# Altium PCB KY-012-Active-buzzer-module-pcb_2025-10-18.pcbdoc
Units mm, origin at the board's own origin, x right, y up, seen from the top; angles counter-clockwise.
Board outline 40.38 x 49.09 mm, 2 copper layers (Top Layer, Bottom Layer); 2 components, 5 nets, 7 pads, 0 vias.
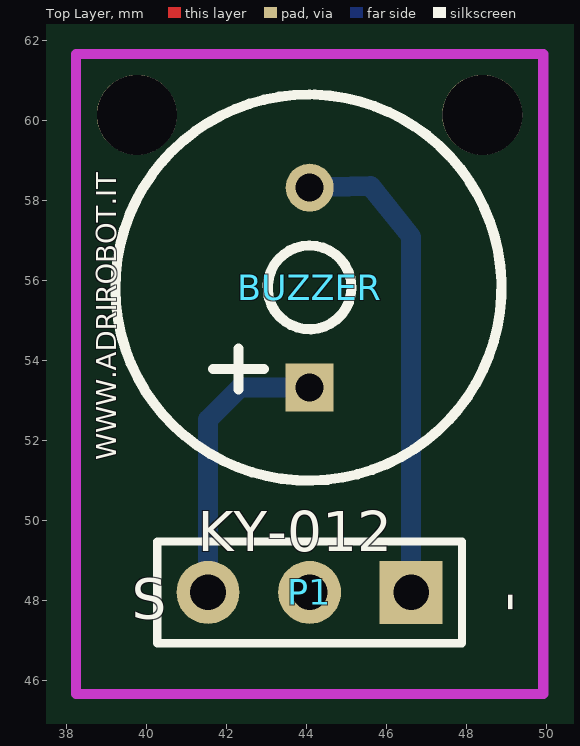
[diagram p0: Top Layer view]
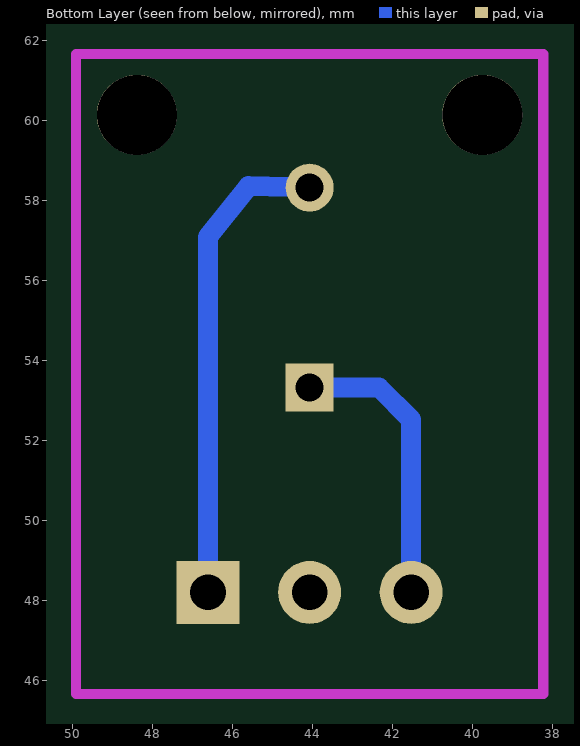
[diagram p1: Bottom Layer view, seen from below]

## Layer stack, top to bottom
Top Layer: signal copper (thickness not stored)
Dielectric: dielectric 0.32, FR-4, Dk 4.8
Bottom Layer: signal copper (thickness not stored)

## Board outline
65.777,25.4 25.4,25.4 25.4,74.489 65.777,74.489

## Components (designator, comment, footprint, x,y, rotation, side; value= is the part's Value field where it differs from the comment)
BUZZER "ZL-DCY09605-2705P-5" BUZZER-R9.6-2P-5.0PITCH 44.069,55.82 r90 top
P1 "Header-Male-2.54_1x3" HDR-3X1/2.54 44.069,48.2 r180 top

## Footprints (in the part's own frame and the unit in brackets; to place one, negate y for a bottom-side part, rotate by r counter-clockwise, add the part's x,y. Pads: shape width x height; smd on the part's side, far side on the other; paste and mask are expansions set on the pad)
BUZZER-R9.6-2P-5.0PITCH [mm]
  rect 1.2x1.2 hole 0.7 paste+0 mask+0.102: 1(-2.501,0)
  round 1.2 hole 0.7 paste+0 mask+0.102: 2(2.5,0)
  silkscreen extent -4.82,-4.79 4.83,4.86
HDR-3X1/2.54 [mil]
  rect 62x62 hole 35 paste+0 mask+4: 1(-100,0)
  round 62 hole 35 paste+0 mask+4: 2(0,0) 3(100,0)
  silkscreen extent -150,-50 150,50

## Free pads (board coordinates)
  round 2 hole 2 unplated paste+0: ""(39.751,60.138) ""(48.387,60.138)

## Nets (pads, with @x,y where several pads share a name; then routed paths per layer and width w, separated by ;. In a path a pad name is that pad's centre, name@x,y a point inside that pad or via, vN(x,y) a via of type N, cw(c..) or ccw(c..) an arc to the next point about the centre after c; other vN are vias at no path point)
$BOARDOUTLINENET: 
GND: BUZZER.2 P1.1 | length 12
  Bottom Layer w0.5: BUZZER.2@44.069,58.319 45.593,58.36 46.609,57.09 P1.1
P1_3: BUZZER.1 P1.3 | length 7.2
  Bottom Layer w0.5: P1.3 41.529,52.518 42.332,53.321 BUZZER.1
S$35: 
S$37: 
pads on no net: P1.2

## Silkscreen, mask and mechanical layers (free items; w line width, h text height)
Top Overlay:
  text "WWW.ADRIROBOT.IT" at 39.239,51.502 h0.5 r90
  text "KY-012" at 41.275,49.224 h1
  text "-" at 48.705,48.2 h1 r270
  text "S" at 39.627,47.545 h1
Document:
  lines w0.003: 45.588,49.944 45.589,49.945